# Altium PCB PCB1.PcbDoc
Units mm, origin at the board's own origin, x right, y up, seen from the top; angles counter-clockwise.
Board outline 35 x 41.5 mm, 2 copper layers (Top Layer, Bottom Layer); 7 components, 7 nets, 28 pads, 0 vias.
Unrouted connection lines stored in the file: 1.
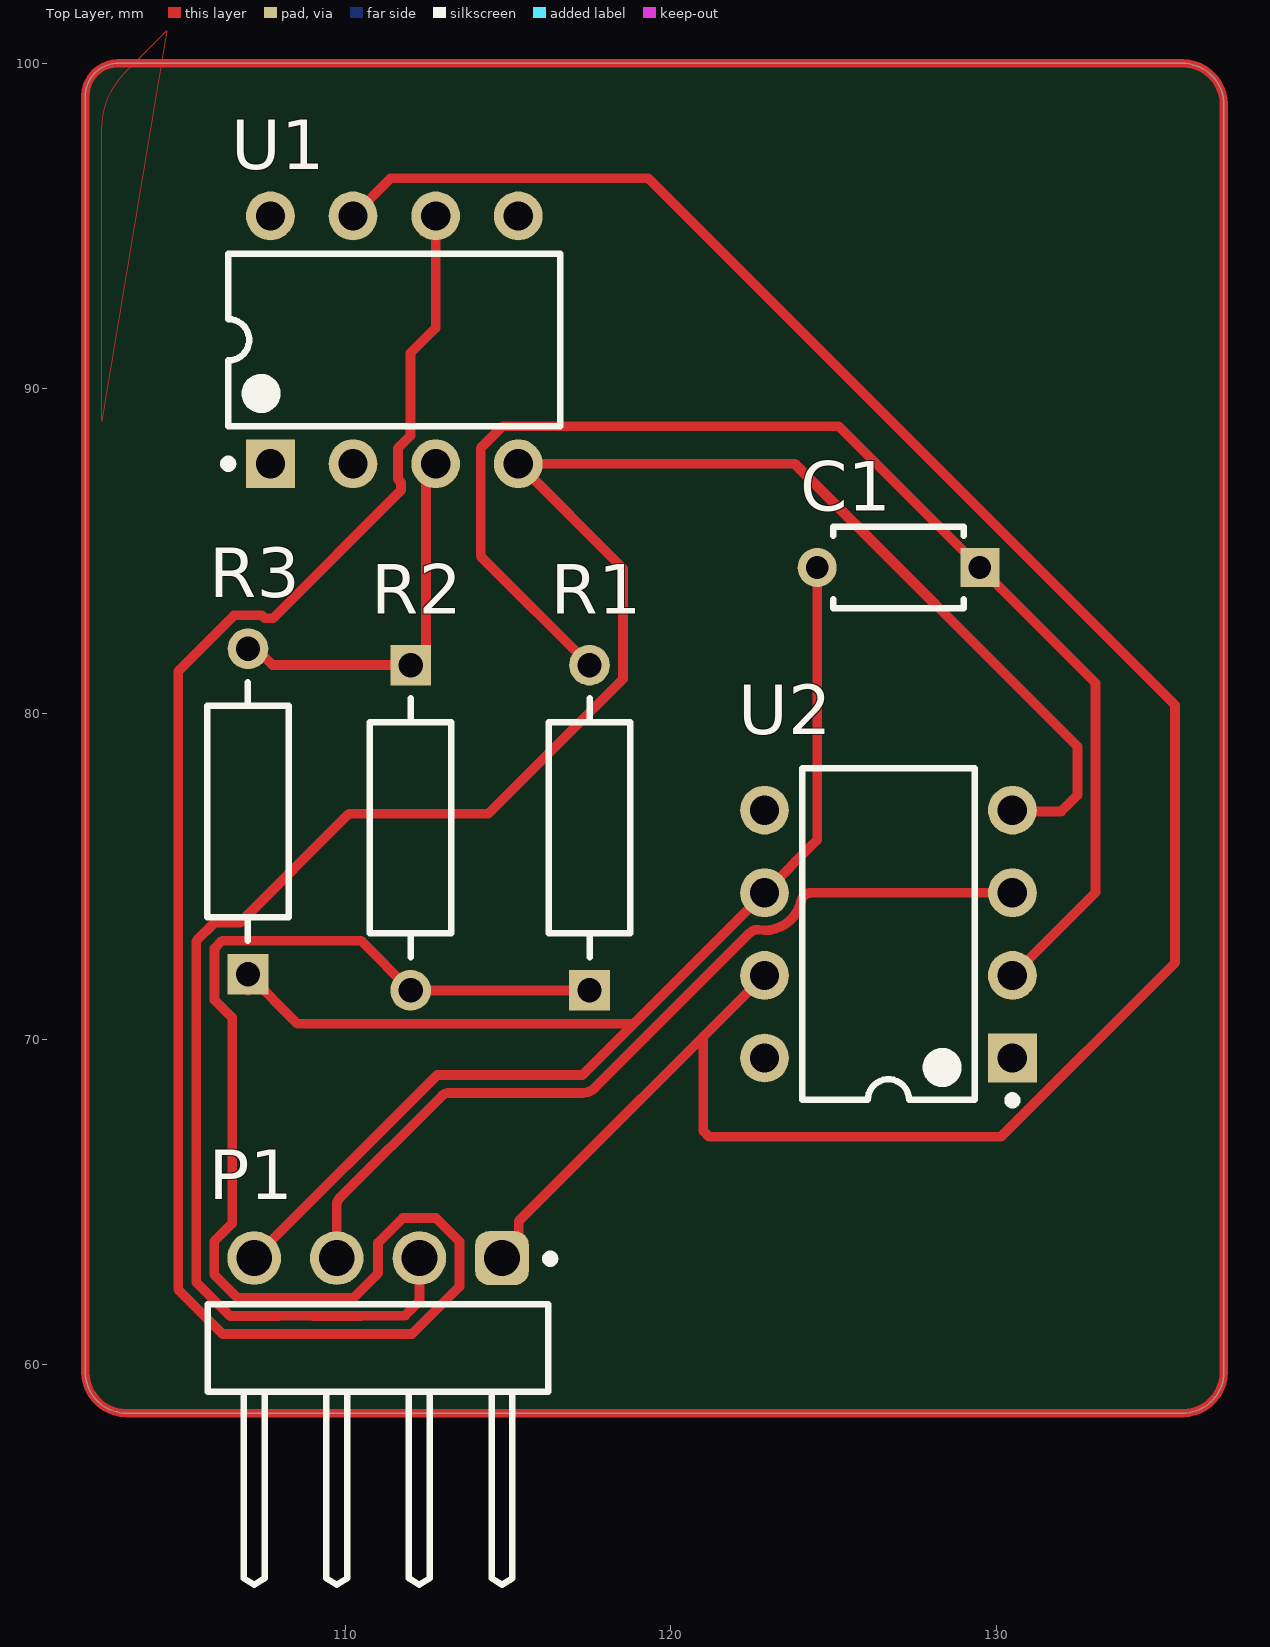
[diagram p0: Top Layer view]
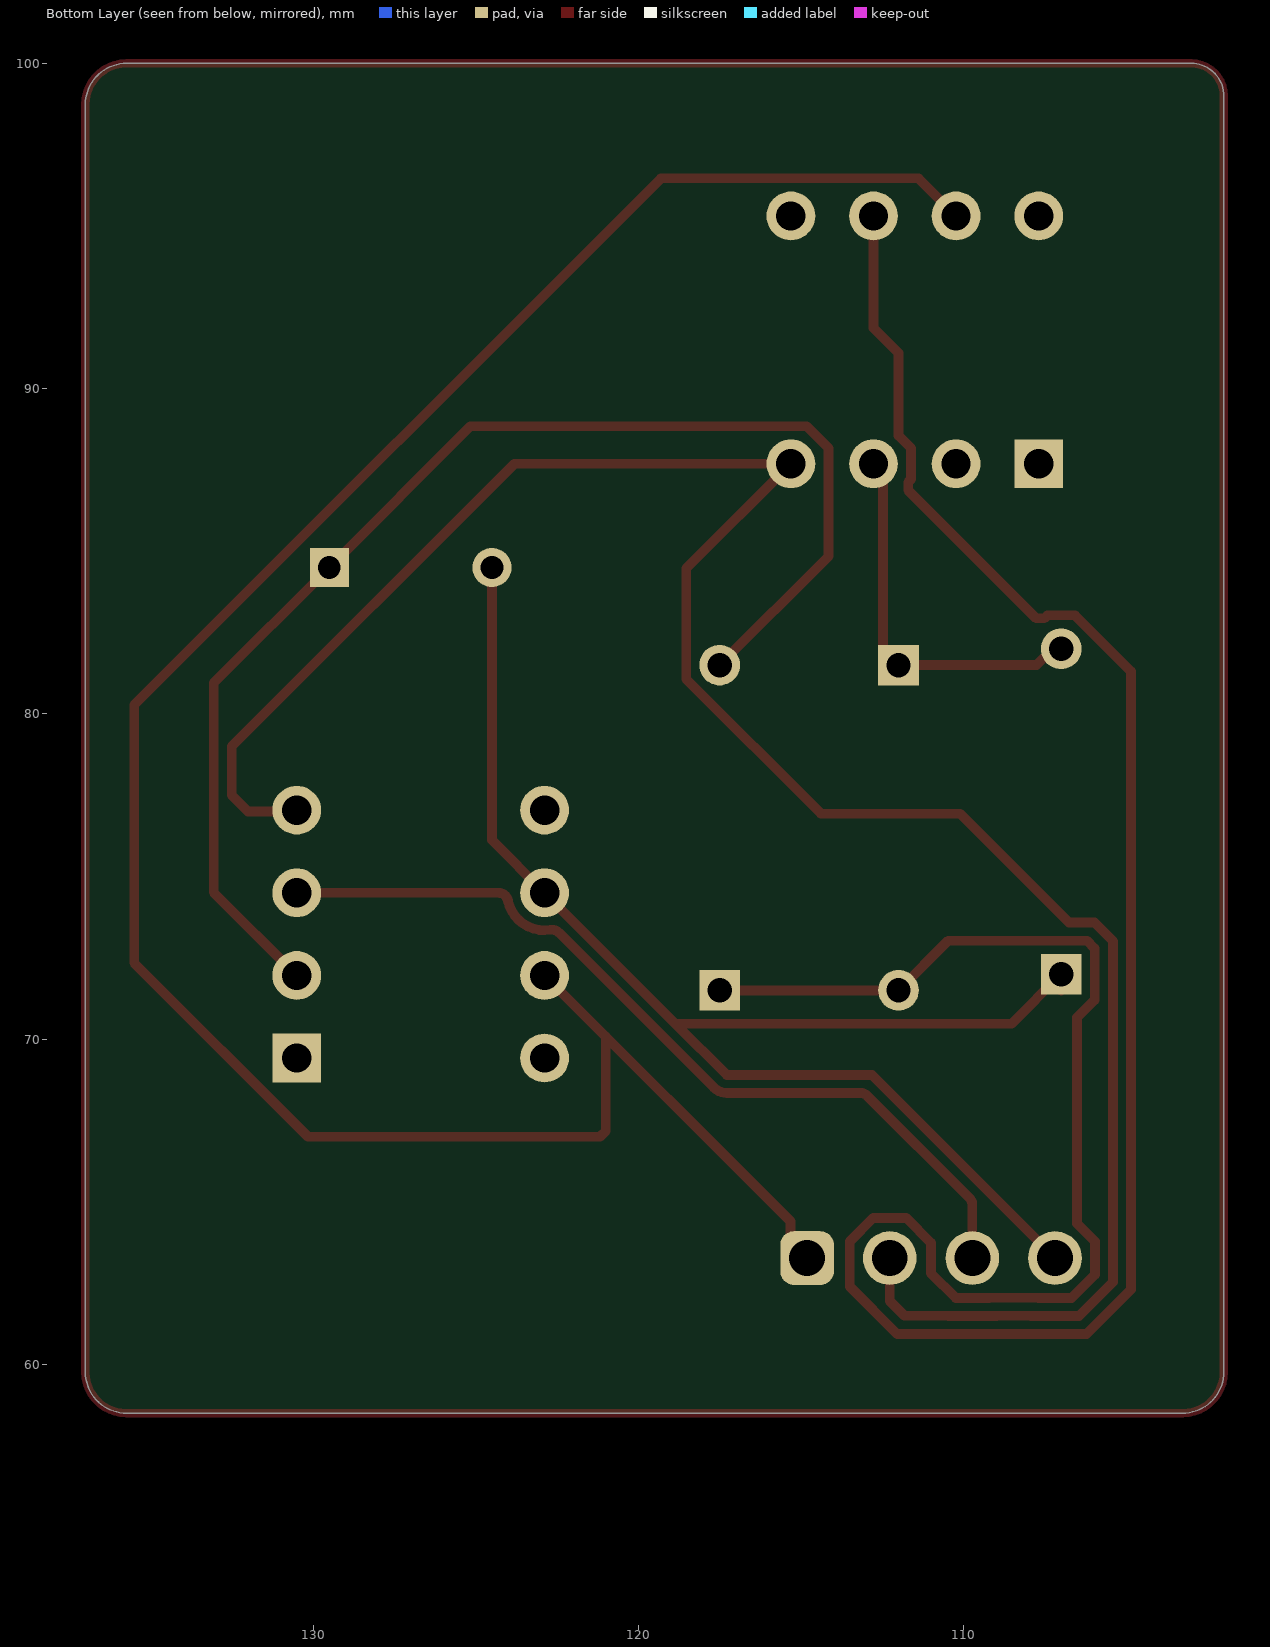
[diagram p1: Bottom Layer view, seen from below]
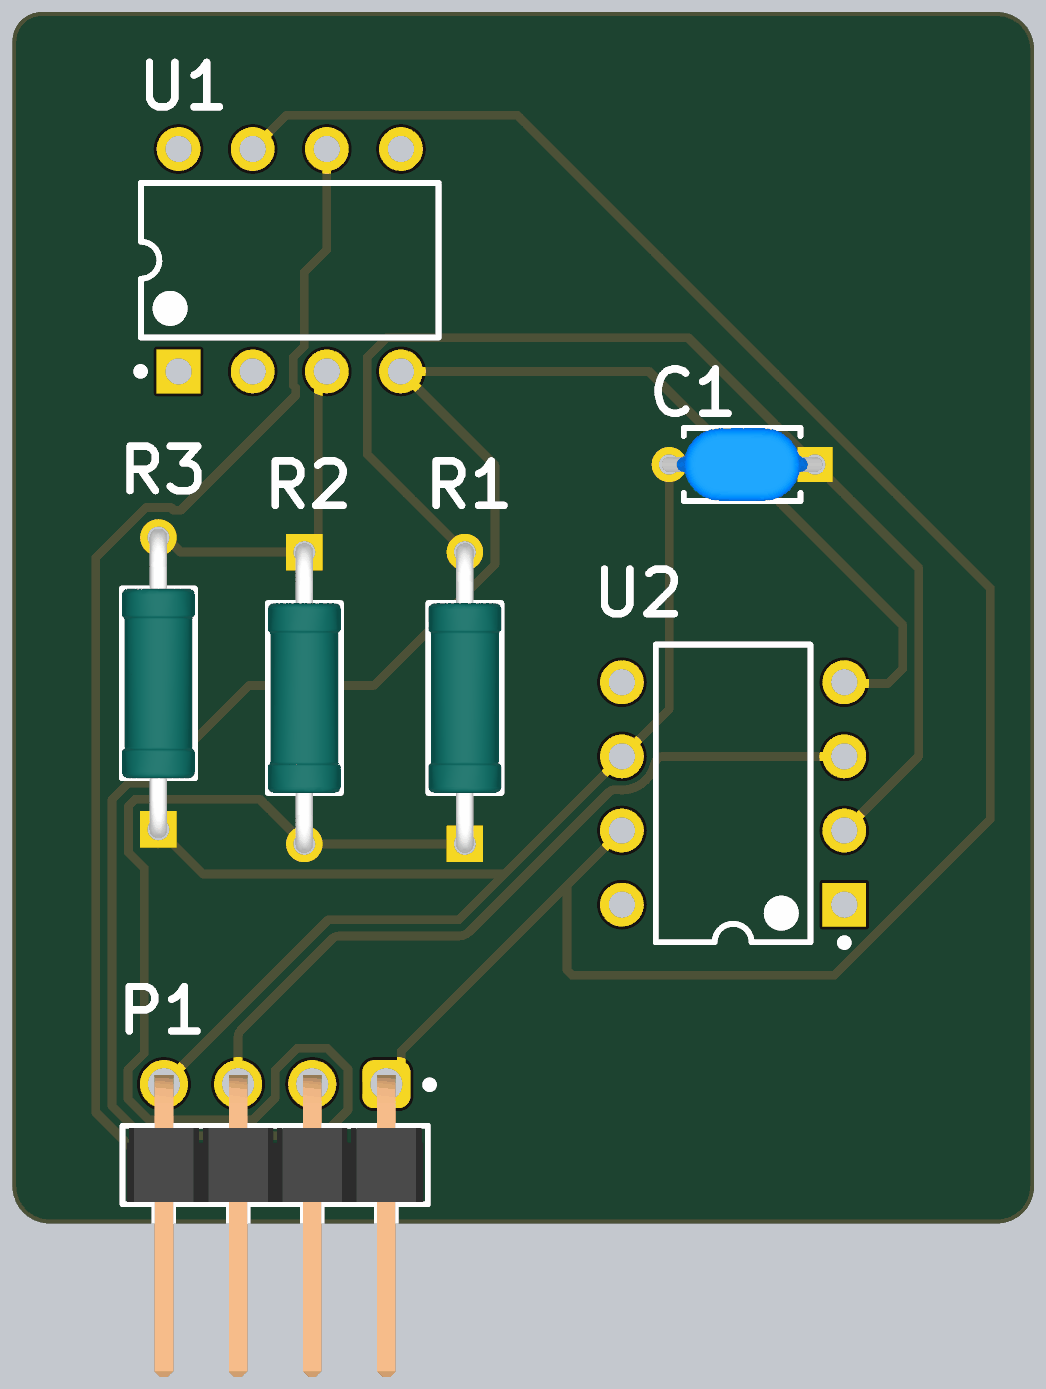
[diagram p2: 3D render of the assembled board from above, using the file's embedded part models]

## Layer stack, top to bottom
Top Solder: solder mask 0.0102, Solder Resist, Dk 3.5
Top Layer: signal copper 0.0356
Dielectric 1: dielectric 0.32, FR-4, Dk 4.8
Bottom Layer: signal copper 0.0356
Bottom Solder: solder mask 0.0102, Solder Resist, Dk 3.5

## Board outline
102,59.77 102,99 cw(c103,99) 103,100 135.73,100 cw(c135.73,98.73) 137,98.73 137,59.77 cw(c135.73,59.77) 135.73,58.5 103.27,58.5 cw(c103.27,59.77)

## Design rules (kind name [scope] priority, off if disabled: settings)
Clearance [All] p1: gap=0.254 ignorepadtopadclearanceinfootprint=FALSE
PolygonConnect [All] p1: connectstyle=Relief reliefconductorwidth=0.254 reliefentries=4 polygonreliefangle="90 Angle" airgapwidth=0.254
RoutingVias [All] p1: holewidth=0.711 width=1.27 viastyle="Through Hole" minholewidth=0.711 minwidth=1.27 maxholewidth=0.711 maxwidth=1.27
SolderMaskExpansion [All] p1: expansion=0.102 istentingtop=FALSE
SupplyNets "Schematic Supply Nets" [InNet('GND')] p1: voltage=0.000
Width [All] p1: maxlimit=0.5 minlimit=0.254 preferedwidth=0.3
30 further rules are at their usual default settings.

## Components (designator, comment, footprint, x,y, rotation, side; value= is the part's Value field where it differs from the comment)
C1 "0.1uF" FP-RDE0M1-MFG 127,84.5 r180 top
P1 "61300411021" 61300411021 111,60.5 r0 top
R1 "12K" FP-MRS25-MFG 117.5,76.5 r90 top
R2 "1K" FP-MRS25-MFG 112,76.5 r270 top
R3 "180" FP-MRS25-MFG 107,77 r90 top
U1 "LM741CN/NOPB" P0008A 111.5,91.5 r90 top
U2 "LM741CN/NOPB" P0008A 126.69,73.23 r180 top

## Footprints (in the part's own frame and the unit in brackets; to place one, negate y for a bottom-side part, rotate by r counter-clockwise, add the part's x,y. Pads: shape width x height; smd on the part's side, far side on the other; paste and mask are expansions set on the pad)
61300411021 [mm] "Pin Header, pitch 2.54 mm, THT, Angled, single row, 4p"
  rrect50% 1.65x1.65 hole 1.1: 1(3.81,2.77)
  round 1.65 hole 1.1: 2(1.27,2.77) 3(-1.27,2.77) 4(-3.81,2.77)
  silkscreen extent -5.23,-7.27 5.42,2.87, body extent -5.08,-7.27 5.08,3.09, height 2.58
FP-MRS25-MFG [mm]
  rect 1.25x1.25 hole 0.75 paste-2539.97 mask+0: 1(-5,0)
  round 1.25 hole 0.75 paste-2539.97 mask+0: 2(5,0)
  silkscreen extent -3.98,-1.25 3.98,1.25, body extent -5.72,-1.35 5.72,1.35, height 0.25
FP-RDE0M1-MFG [mm]
  rect 1.2x1.2 hole 0.7 paste-2539.97 mask+0: 1(-2.5,0)
  round 1.2 hole 0.7 paste-2539.97 mask+0: 2(2.5,0)
  silkscreen extent -2,-1.25 2,1.25, body extent -3.2,-1.35 3.2,1.35, height 0.25
P0008A [mm] "DIP, 8-Leads, Body 10.15x6.6mm, Pitch 2.54mm"
  rect 1.5x1.5 hole 0.9: 1(-3.81,3.81)
  round 1.5 hole 0.9: 2(-3.81,1.27) 3(-3.81,-1.27) 4(-3.81,-3.81) 5(3.81,-3.81) 6(3.81,-1.27) 7(3.81,1.27) 8(3.81,3.81)
  silkscreen extent -3.93,-5.1 2.65,5.23, body extent -3.95,-5.07 3.95,5.07, height 5.08

## Part data
C1: library part CMP-06035-051680-1, "Ceramic Capacitor 100nF ±10% 50V X7R Radial", Capacitance=100nF, Case/Package=Radial, Dielectric=X7R, Max Operating Temperature=125°C, Min Operating Temperature=-55°C, Package Quantity=2000, Resistor Type=Ceramic, Tolerance=10%, Voltage Rating=50V, Height=3.5mm, Height - Seated (Max)=0.236inch, Lead Diameter=0.5mm, Lead Free="Lead Free", Lead Pitch=0.197inch, Lead/Base Style=Kinked, Length=0.157inch, Mount="Through Hole", Packaging="Tape and Reel", Termination=Radial, Voltage Rating (DC)=50V, Width=3.5mm
P1: library part CMP-1502-01063-3, Color=Black, Contact Resistance=20mΩ, Current Rating=3A, Operating Supply Voltage=250V, Connector Type="Male Pin", Contact Material=Copper, Contact Mating Length=5.9944mm, Contact Plating=Gold, Gender=Male, Lead Pitch=2.54mm, Mount="Through Hole", NexarPartId=31153320, Number of Contacts=4, Number of Pins=4, Number of Positions=4, Number of Rows=1, Pitch=2.54mm, REACH SVHC=Unknown, RoHS=Compliant, Termination=Solder
R1 R2 R3: library part CMP-02408-000051-1, "RES 1K OHM 0.6W 1% AXIAL", Case/Package=Axial, Max Operating Temperature=155°C, Max Power Dissipation=600mW, Min Operating Temperature=-55°C, Package Quantity=5000, Resistance=1kR, Resistance Tolerance=1%, Resistor Type="Metal Film", Temperature Coefficient=50ppm/°C, Voltage Rating=350V, Construction=Cylindrical, Contact Plating=Tin, Diameter=2.5mm, Lead Diameter=0.6mm, Lead Free="Lead Free", Length=6.5mm, Military Standard=Not, Mount="Through Hole", Number of Pins=2, Number of Terminations=2, Packaging="Tape and Reel", Power Rating=600mW, Radiation Hardening=No, RoHS Compliant=Yes, Series=MRS25, Technology="THIN FILM", Termination=Axial, Tolerance=1%, Voltage Rating (DC)=350V, Weight=0.00776oz, Width=2.5mm
U1 U2: library part CMP-0055-00162-3, "Operational Amplifier, 8-pin MDIP, Pb-Free", Manufacturer="Texas Instruments", Package Reference=P0008A, PackageTopMarking=NSUZXYTTE#*LM*741CN, PowerWise=N, Code_JEDEC=MS-001-BA, ComponentLink1Description="Datasheet URL", ComponentLink1URL=http://www.ti.com/general/docs/lit/getliterature.tsp?genericPartNumber=LM741&fileType=pdf, CompType=Amplifiers, PackageDescription="MDIP, .365 x .250 x .130in, 8 Lead, .100in Pitch", PinCount=8, RoHS=Y

## Nets (pads, with @x,y where several pads share a name; then routed paths per layer and width w, separated by ;. In a path a pad name is that pad's centre, name@x,y a point inside that pad or via, vN(x,y) a via of type N, cw(c..) or ccw(c..) an arc to the next point about the centre after c; other vN are vias at no path point)
+vcc: P1.1 U1.7 U2.7 | length 72.1
  Top Layer w0.3: U1.7 111.384,96.464 119.307,96.464 135.5,80.271 135.5,72.349 130.151,67 121.176,67 121,67.176 121,70.08 ; P1.1 115.323,63.783 115.323,64.403 U2.7
-VCC: P1.2 U1.4 U2.4 | length 68.2
  Top Layer w0.3: P1.2 112.27,61.946 111.824,61.5 110.482,61.5 110.469,61.487 108.991,61.487 108.978,61.5 107.942,61.5 107.929,61.487 106.451,61.487 105.407,62.531 105.407,73.012 105.978,73.583 106.762,73.583 110.112,76.933 114.388,76.933 118.529,81.074 118.529,84.471 U1.4 123.81,87.69 132.5,79 132.5,77.5 132,77 130.54,77 U2.4
GND: P1.3 U1.2 U2.3 | length 26.5
  Top Layer w0.3: P1.3 109.73,64.902 cw(c110.03,64.902) 109.817,65.114 112.962,68.258 cw(c113.173,68.045) 113.173,68.345 117.279,68.345 ccw(c117.279,68.899) 117.671,68.508 119.242,70.079 ; 119.243,70.079 122.439,73.275 cw(c122.652,73.064) 122.698,73.36 ccw(c122.88,74.5) 124.009,74.263 cw(c124.303,74.2) 124.301,74.5 U2.3
NetC1_1: C1.1 R1.2 U2.2 | length 40.5
  Top Layer w0.3: R1.2 114.156,84.844 114.156,88.168 114.832,88.844 125.156,88.844 C1.1 133.054,80.946 133.054,74.514 U2.2
NetC1_2: C1.2 P1.4 R3.1 U2.6 | length 44
  Top Layer w0.3: R3.1@107,71.5 R3.1 108.529,70.471 118.851,70.471 ; P1.4 112.819,68.899 117.279,68.899 118.851,70.471 ; C1.2 124.5,76.12 U2.6 118.851,70.471
NetR1_1: R1.1 R2.2 U1.6 | length 80.9
  Top Layer w0.3: U1.6 112.77,91.862 112,91.092 112,88.552 111.616,88.168 111.616,87.212 111.705,87.123 111.705,86.875 107.767,82.937 107.518,82.937 107.426,83.029 106.574,83.029 104.853,81.308 104.853,62.302 106.222,60.933 112.041,60.933 113.499,62.391 113.499,63.779 112.779,64.499 111.761,64.499 111,63.738 111,62.802 110.239,62.041 109.221,62.041 109.208,62.054 107.712,62.054 107.699,62.041 106.681,62.041 105.961,62.761 105.961,63.779 106.515,64.333 106.515,70.664 105.971,71.208 105.971,72.792 106.208,73.029 110.471,73.029 R2.2 R1.1
NetR2_1: R2.1 R3.2 U1.3 | length 12.1
  Top Layer w0.3: R3.2 107.257,82 107.757,81.5 R2.1 112.475,81.975 112.475,87.07 112.77,87.365 U1.3 112.77,87.73 U1.3@112.5,88
pads on no net: U1.1 U1.5 U1.8 U2.1 U2.5 U2.8
copper on no net: | length 150.9
  Top Layer w0.254: 102,59.77 ccw(c103.27,59.77) 103.27,58.5 135.73,58.5 ccw(c135.73,59.77) 137,59.77 137,98.73 ccw(c135.73,98.73) 135.73,100 103,100 ccw(c103,99) 102,99 102,59.77

## Polygon pours and split planes (outlines as drawn)
no net on Top Layer "NONET_L01_P000" (solid, pour order 0): 102.5,89 102.5,97.948 cw(c105.04,97.948) 103.244,99.744 104.5,101

## Silkscreen, mask and mechanical layers (free items; w line width, h text height)
Mechanical 1:
  lines w0.254: 90.5,42.77 ccw(c91.77,42.77) 91.77,41.5 143.23,41.5 ccw(c143.23,42.77) 144.5,42.77 144.5,104.23 ccw(c143.23,104.23) 143.23,105.5 92.5,105.5 91.77,105.5 ccw(c91.77,104.23) 90.5,104.23 90.5,42.77